# Altium PCB main.PcbDoc (part 2 of 3)
Units mm, origin at the board's own origin, x right, y up, seen from the top; angles counter-clockwise.
Board outline 126 x 86 mm, 2 copper layers (Top Layer, Bottom Layer); 214 components, 256 nets, 850 pads, 614 vias.
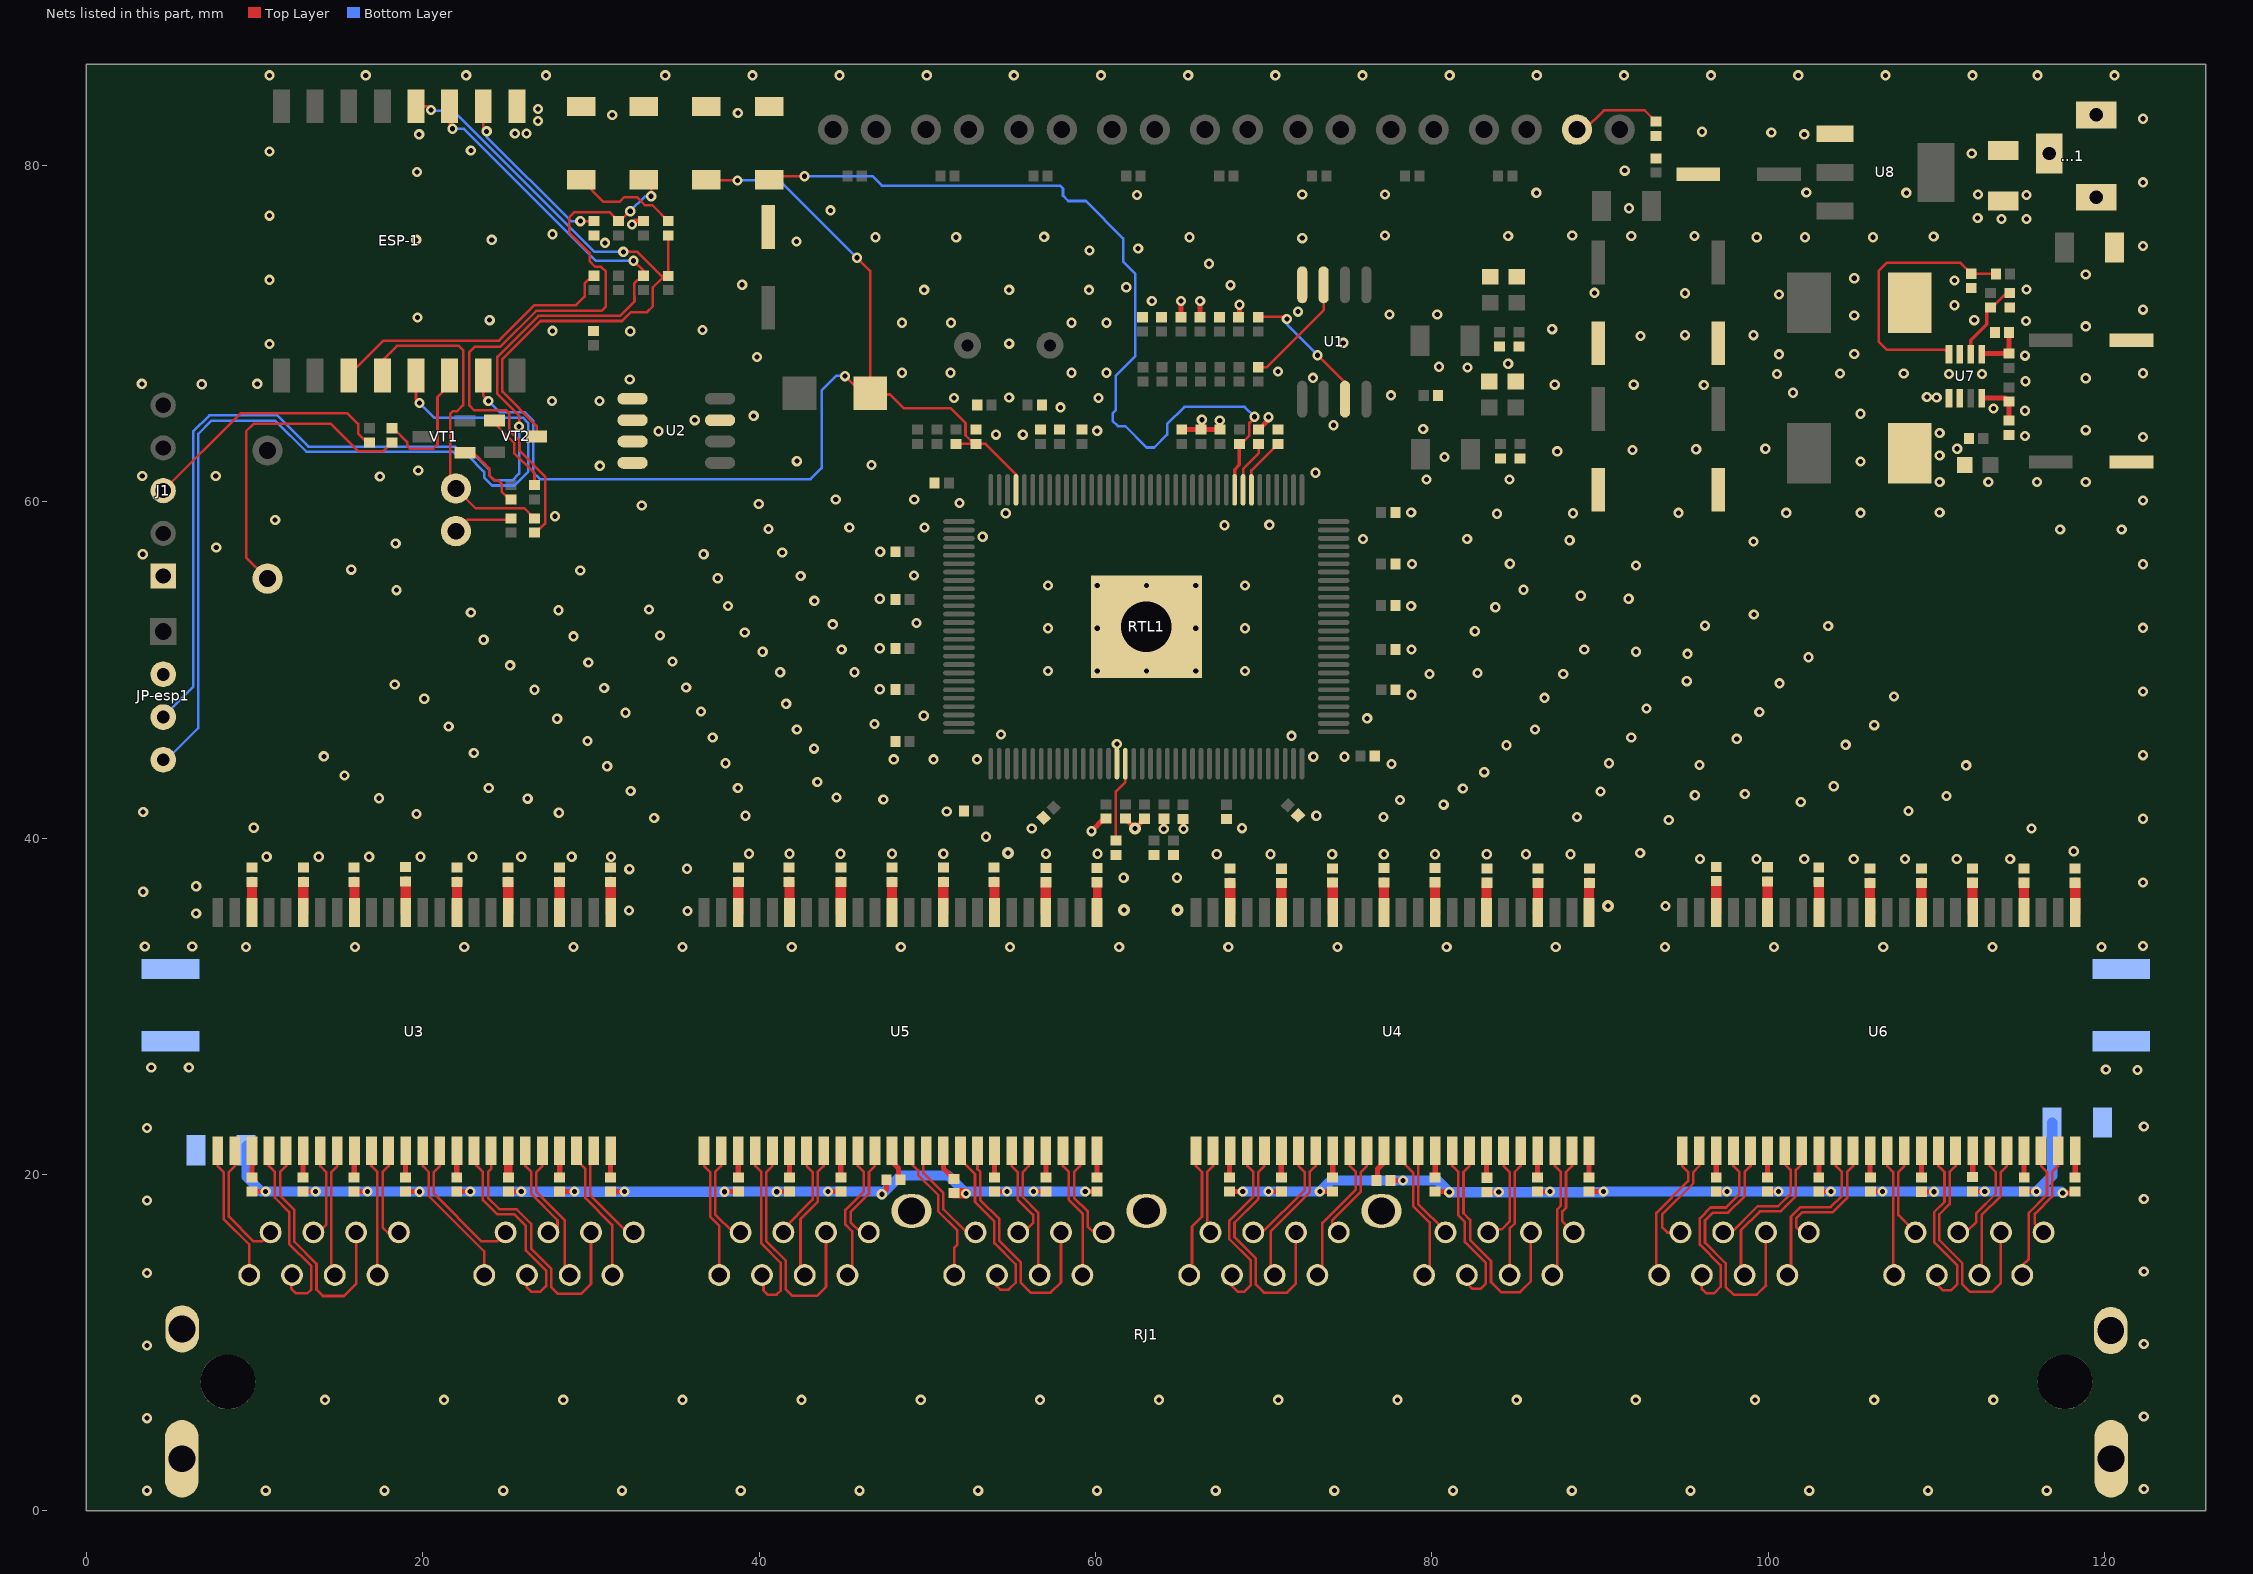
[diagram p2: the nets of this part, all layers, seen from the top]

## Via types
v1: diameter 0.61, hole 0.305, Top Layer to Bottom Layer, 609 vias
v2: diameter 0.711, hole 0.305, Top Layer to Bottom Layer, 5 vias

## Nets (pads, with @x,y where several pads share a name; then routed paths per layer and width w, separated by ;. In a path a pad name is that pad's centre, name@x,y a point inside that pad or via, vN(x,y) a via of type N, cw(c..) or ccw(c..) an arc to the next point about the centre after c; other vN are vias at no path point) (continued)
GND: C1.2 C2.2 C3.2 C4.1 C5.2 C6.2 C7.1 C8.1 C9.1 C10.1 C11.1 C12.1 C13.1 C14.1 C15.1 C16.1 C17.1 C18.1 C19.1 C20.1 C21.1 C22.1 C25.1 C26.1 C27.1 C28.1 C29.1 C30.1 C31.1 C32.1 C33.1 C34.1 C35.1 C36.1 C37.1 C38.1 C39.1 C40.1 C43.2 C44.2 C45.1 C46.1 C47.1 C48.1 C49.1 C50.1 C51.2 C52.2 C53.1 C54.1 C55.1 C56.1 C57.1 C58.1 C59.1 C60.1 C61.1 C62.1 C63.1 C64.1 C65.1 C66.1 C67.1 C68.1 C69.1 C70.1 C71.1 C72.1 C73.1 C74.1 C75.1 C76.1 C77.1 C78.1 C79.1 C80.1 C81.1 C82.1 C83.1 C84.1 C85.1 C86.1 C87.1 C88.1 C89.1 C90.1 C91.1 C92.1 C93.1 C94.1 ESP-1.9 J1.1 JP-esp1.2 L4.1 R1.1@40.589,83.496 R2.1@36.855,83.49 R11.2 R12.2 R13.2 R20.2 R21.2 R22.2 R23.2 R24.2 R25.2 R26.2 R36.1 R81.1 R82.1 RTL1.16 RTL1.129 S1.2 S2.2 U1.4 U2.1 U2.2 U2.3 U2.4 U2.7 U7.5 U8.1 | length 11.4
  Top Layer w0.305: v1(32.436,76.479) 32.632,76.676 C6.2@33.122,76.676 ; v1(59.766,40.411) 60.51,41.155 C80.1@60.63,41.155 ; C89.1@61.773,41.155 61.773,41.148 v2(62.357,40.564) 62.357,40.589 C82.1@62.916,41.148 ; v1(64.059,40.538) C93.1@64.059,41.148 ; R11.2@65.075,70.961 v1(65.075,71.933) ; C87.1@65.126,64.281 C45.1@66.269,64.281 C45.1@66.319,64.331 ; C83.1@65.202,41.129 65.202,40.564 v1(65.227,40.538) ; R25.2@66.218,70.961 v1(66.218,71.933) ; v1(66.319,64.872) C45.1@66.319,64.331 ; C90.1@67.412,64.281 66.319,64.281 C45.1@66.319,64.331 ; R12.2@68.504,70.961 68.555,71.012 v1(68.555,71.704) ; R20.2@69.698,64.281 70.282,64.865 v1(70.282,65.024)
  other v1: 9.487,33.528 15.977,33.528 22.466,33.528 28.956,33.528 35.446,33.528 41.935,33.528 48.425,33.528 54.915,33.528 61.404,33.528 67.894,33.528 74.384,33.528 80.874,33.528 87.363,33.528 93.853,33.528 100.343,33.528 106.832,33.528 113.322,33.528 119.812,33.528 3.48,33.553 6.299,33.553 122.276,33.579 6.528,35.509 35.738,35.662 32.258,35.687 93.878,35.966 3.378,36.805 6.528,37.135 122.276,37.362 61.671,37.643 64.846,37.643 32.283,38.151 35.712,38.176 95.936,38.76 99.289,38.76 102.133,38.76 105.08,38.76 108.128,38.76 111.201,38.76 114.376,38.76 10.719,38.887 13.818,38.887 16.815,38.887 19.863,38.887 22.962,38.887 25.857,38.887 28.854,38.887 31.191,38.887 67.208,39.04 70.409,39.04 74.066,39.04 77.14,39.04 80.188,39.04 83.261,39.04 85.598,39.04 88.24,39.04 39.395,39.065 41.808,39.065 44.831,39.065 47.904,39.065 50.952,39.065 57.048,39.065 60.122,39.065 92.38,39.116 118.161,39.218 53.492,40.081 56.21,40.564 115.646,40.564 68.707,40.589 9.957,40.615 94.082,41.072 122.276,41.146 33.757,41.199 77.114,41.25 88.621,41.25 39.192,41.326 73.127,41.326 19.634,41.427 28.092,41.504 3.378,41.554 51.156,41.58 108.331,41.605 80.696,41.986 101.93,42.139 78.105,42.266 47.385,42.29 26.238,42.342 17.399,42.367 44.602,42.418 110.592,42.494 95.631,42.545 98.603,42.621 90.018,42.774 32.36,42.799 81.839,42.951 23.927,42.977 38.735,42.977 103.886,43.078 43.459,43.332 15.342,43.713 83.109,43.917 30.963,44.272 111.76,44.323 95.91,44.348 77.597,44.399 37.998,44.45 90.526,44.45 48.006,44.679 50.368,44.679 52.959,44.679 72.949,44.831 74.803,44.831 14.122,44.856 122.276,44.93 23.038,45.06 43.256,45.314 84.43,45.517 104.597,45.542 61.265,45.593 29.794,45.771 98.12,45.898 37.236,45.974 91.846,45.974 71.653,46.076 54.381,46.152 42.24,46.457 86.131,46.457 21.539,46.634 106.299,46.711 46.863,46.787 27.991,47.092 76.149,47.117 49.784,47.269 32.055,47.447 99.466,47.498 36.551,47.523 92.761,47.701 41.605,47.981 20.091,48.285 86.69,48.336 107.467,48.412 78.791,48.514 122.276,48.713 26.645,48.819 47.168,48.844 30.785,48.92 35.662,48.946 18.339,49.124 100.66,49.2 95.148,49.327 79.858,49.759 87.808,49.759 82.702,49.809 41.25,49.86 45.669,49.86 57.175,49.936 60.103,49.936 63.03,49.936 65.957,49.936 68.885,49.936 25.197,50.267 29.845,50.444 34.849,50.495 102.387,50.749 95.199,50.952 40.208,51.079 92.126,51.079 44.907,51.206 78.791,51.206 89.052,51.206 47.168,51.283 23.622,51.791 28.956,51.994 34.112,52.045 39.141,52.222 82.55,52.299 57.175,52.476 60.103,52.476 65.957,52.476 68.885,52.476 122.276,52.497 103.556,52.603 96.241,52.629 44.374,52.705 49.352,52.781 99.136,53.289 22.86,53.416 28.067,53.543 33.452,53.594 83.769,53.721 38.151,53.797 78.765,53.797 43.282,54.102 47.168,54.229 91.694,54.229 88.849,54.407 18.44,54.737 85.446,54.762 57.175,55.016 60.103,55.016 63.03,55.016 65.957,55.016 68.885,55.016 37.541,55.448 42.469,55.575 49.21,55.615 29.362,55.905 15.748,55.956 92.126,56.21 78.816,56.286 122.276,56.281 84.633,56.312 3.353,56.871 36.703,56.871 41.377,56.972 47.193,57.023 7.722,57.277 18.39,57.506 99.111,57.633 88.189,57.709 75.895,57.785 82.093,57.785 53.289,57.912 117.348,58.344 121.006,58.344 40.564,58.369 45.364,58.471 49.835,58.471 67.666,58.598 70.333,58.623 11.227,58.903 27.864,59.131 83.871,59.284 54.661,59.309 88.392,59.309 94.666,59.334 101.067,59.334 105.486,59.334 78.765,59.36 110.185,59.36 33.02,59.766 39.98,59.868 51.918,59.919 122.276,60.064 44.554,60.122 49.225,60.122 110.185,61.163 113.081,61.163 115.976,61.163 118.872,61.163 79.68,61.316 84.607,61.316 17.45,61.493 3.327,61.519 7.696,61.519 73.076,61.722 19.736,61.849 30.531,62.128 46.685,62.179 105.486,62.382 42.24,62.408 80.747,62.662 110.185,62.738 87.452,62.992 91.923,63.068 95.707,63.119 99.822,63.144 111.227,63.144 122.276,63.848 115.265,63.906 54.077,63.983 55.677,63.983 110.185,64.084 34.011,64.186 60.096,64.211 118.872,64.249 79.477,64.313 74.143,64.541 67.386,64.821 36.17,64.846 39.675,65.1 105.486,65.227 115.265,65.405 113.386,65.532 57.912,65.608 27.686,65.989 30.505,65.989 51.587,66.167 60.173,66.167 54.864,66.192 110.007,66.192 109.423,66.218 77.572,66.319 101.473,66.472 96.164,66.929 87.3,66.954 91.999,66.954 6.858,66.98 3.302,67.005 10.16,67.005 115.291,67.158 32.309,67.259 118.872,67.335 72.923,67.361 100.508,67.589 110.744,67.589 112.7,67.589 104.267,67.615 108.052,67.615 122.276,67.631 48.489,67.666 51.384,67.666 58.572,67.666 60.655,67.666 70.841,67.742 82.118,67.97 80.416,68.021 84.531,68.199 39.878,68.605 115.265,68.682 100.635,68.758 105.105,68.783 10.897,69.367 54.864,69.393 74.727,69.444 92.405,69.85 95.047,69.901 99.111,69.901 32.334,70.129 27.711,70.155 36.627,70.206 87.147,70.256 118.872,70.421 48.489,70.637 51.41,70.637 58.572,70.637 60.655,70.637 115.316,70.739 23.978,70.79 112.243,70.79 19.685,70.942 105.105,71.069 77.47,71.12 80.315,71.12 72.034,71.298 122.276,71.415 111.074,71.679 63.348,71.933 100.635,72.314 95.047,72.39 89.662,72.415 49.809,72.593 54.864,72.593 59.614,72.593 115.341,72.619 61.824,72.746 68.021,72.873 38.989,72.898 111.074,73.152 10.897,73.186 105.105,73.279 118.872,73.508 66.751,74.143 59.639,74.93 62.535,75.057 122.276,75.199 30.836,75.387 42.215,75.463 19.609,75.565 24.105,75.565 72.288,75.667 46.914,75.717 51.714,75.717 65.583,75.717 99.314,75.717 102.184,75.717 106.223,75.717 56.947,75.743 109.83,75.768 84.531,75.794 91.846,75.794 95.606,75.794 77.216,75.819 88.341,75.819 27.711,75.895 113.868,76.81 115.341,76.81 112.446,76.86 10.897,77.004 44.247,77.318 91.719,77.445 62.459,78.232 115.341,78.232 72.288,78.257 77.216,78.257 112.471,78.257 86.208,78.359 108.204,78.359 102.26,78.384 122.276,78.982 19.66,79.604 91.465,79.68 112.09,80.696 10.897,80.823 22.86,80.874 19.787,81.839 102.133,81.839 25.476,81.89 26.162,81.89 100.178,81.94 96.063,81.991 26.848,82.626 122.276,82.766 31.267,82.982 38.735,83.109 26.848,83.337 10.897,85.344 16.612,85.344 22.581,85.344 27.33,85.344 34.417,85.344 39.599,85.344 44.78,85.344 49.962,85.344 55.143,85.344 60.325,85.344 65.507,85.344 70.688,85.344 75.87,85.344 81.051,85.344 86.233,85.344 91.415,85.344 96.596,85.344 101.778,85.344 106.959,85.344 112.141,85.344 116.002,85.344 120.574,85.344
  other v2: 61.697,35.712 64.872,35.712 90.475,35.966 54.788,39.116
GND_M: C23.1 C41.2 C43.1 C44.1 RJ1.0
  other v1: 3.61,1.2 10.669,1.2 17.728,1.2 24.787,1.2 31.845,1.2 38.904,1.2 45.963,1.2 53.022,1.2 60.081,1.2 67.14,1.2 74.198,1.2 81.257,1.2 88.316,1.2 95.375,1.2 102.434,1.2 109.493,1.2 116.551,1.2 122.326,1.295 3.61,5.512 122.326,5.608 14.185,6.6 21.27,6.6 28.355,6.6 35.44,6.6 42.525,6.6 49.61,6.6 56.695,6.6 63.78,6.6 70.865,6.6 77.95,6.6 85.035,6.6 92.12,6.6 99.205,6.6 106.29,6.6 113.375,6.6 3.61,9.825 122.326,9.92 3.61,14.137 122.326,14.233 3.61,18.45 122.326,18.545 3.61,22.762 122.326,22.858 121.945,26.213 120.066,26.238 3.861,26.365 6.096,26.365
GPIO0: ESP-1.12 R32.2 R34.1 VT2.3 | length 39.3
  Top Layer w0.152: ESP-1.12@19.6,83.5 20.284,83.5 v1(20.498,83.287) ; VT2.3@26.777,63.881 26.777,64.5 24.74,66.537 24.74,68.478 27,70.739 31.851,70.739 32.384,71.272 33.343,71.272 33.675,71.605 33.675,72.737 R34.1@34.363,73.425 ; v1(31.928,74.854) 32.766,74.854 34.195,73.425 R34.1@34.363,73.425 ; R32.2@34.595,75.826 R34.1@34.595,73.425 R34.1@34.363,73.425
  Bottom Layer w0.152: v1(20.498,83.287) 20.549,83.236 21.826,83.236 30.208,74.854 v1(31.928,74.854)
GPIO0_RTL: R1.2@40.589,79.146 R14.1 RTL1.73 | length 50.2
  Top Layer w0.152: R1.2@40.589,79.146 40.792,79.35 v1(42.697,79.35) ; R14.1@68.555,63.431 68.653,63.431 69.144,63.922 69.144,64.675 69.444,64.975 v1(69.444,65.049)
  Top Layer w0.203: RTL1.73@68.27,60.705 68.27,61.905 68.555,62.189 R14.1@68.555,63.431
  Bottom Layer w0.152: v1(42.697,79.35) 46.737,79.35 47.296,78.791 57.887,78.791 58.064,78.613 58.064,78.189 58.377,77.876 59.426,77.876 61.646,75.657 61.646,74.27 62.357,73.558 62.357,68.638 61.214,67.495 61.214,65.448 61.011,65.245 61.011,64.803 61.323,64.491 61.765,64.491 63.035,63.221 63.491,63.221 64.262,63.991 64.262,64.618 65.278,65.634 68.859,65.634 v1(69.444,65.049)
GPIO2: ESP-1.11 JP-esp1.3 R35.1 | length 74.8
  Top Layer w0.152: ESP-1.11@21.6,83.5 21.6,82.337 v1(21.768,82.169) ; v1(25.73,64.465) 25.73,65.115 24.435,66.411 24.435,68.605 26.874,71.044 31.725,71.044 32.588,71.907 32.588,72.167 32.568,72.187 32.568,72.976 33.023,73.431 R35.1@33.122,73.431 33.122,73.736 v1(32.537,74.32)
  Bottom Layer w0.152: JP-esp1.3@4.563,47.203 6.35,48.99 6.35,64.16 7.315,65.126 11.355,65.126 13.209,63.271 21.934,63.271 22.163,63.043 22.81,63.043 23.952,61.901 23.952,61.57 24.257,61.265 25.324,61.265 25.73,61.671 v1(25.73,64.465) ; v1(21.768,82.169) 22.462,82.169 30.311,74.32 v1(32.537,74.32)
GPIO12: ESP-1.6 R38.2 | length 7.9
  Top Layer w0.152: R38.2@18.161,64.364 18.259,64.364 19.075,63.547 19.075,63.297 19.228,63.144 20.625,63.144 20.879,63.398 20.879,66.218 21.6,66.939 ESP-1.6@21.6,67.5
GPIO14: ESP-1.5 JP-esp1.4 | length 55.2
  Top Layer w0.152: ESP-1.5@19.6,67.5 19.6,66.074 v1(19.812,65.862)
  Bottom Layer w0.152: JP-esp1.4@4.572,44.653 4.242,44.323 4.242,44.12 6.655,46.533 6.655,64.034 7.441,64.821 11.229,64.821 13.083,62.967 21.808,62.967 22.036,62.738 22.684,62.738 23.647,61.774 23.647,61.443 24.131,60.96 25.45,60.96 26.264,61.774 26.264,64.686 25.951,64.999 20.676,64.999 v1(19.812,65.862)
GPIO16: ESP-1.4 LED1.K R39.2 | length 20.4
  Top Layer w0.152: ESP-1.4@17.6,67.5 17.6,68.4 18.466,69.266 22.149,69.266 22.403,69.012 22.403,65.735 22.052,65.384 21.79,65.384 21.641,65.235 21.641,61.112 LED1.K@21.971,60.782 23.146,59.607 26.042,59.607 R39.2@26.645,59.004
MP2122_FB1: R80.1 R82.2 U7.8 | length 2.8
  Top Layer w0.305: U7.8@112.684,66.162 114.083,66.162 R80.1@114.3,65.945 R82.2@114.3,64.814
MP2122_FB2: R79.1 R81.2 U7.1 | length 2.9
  Top Layer w0.152: U7.1@112.684,68.762 U7.1@112.724,68.802 ; R81.2@114.3,70.035 R81.2@114.319,70.053
  Top Layer w0.305: U7.1@112.724,68.802 R79.1@114.3,68.802 R81.2@114.3,70.035
MP2122_SW1: L6.1 U7.6
MP2122_SW2: L5.1 U7.3
N0A_N: RJ1.1 U3.25 | length 8.2
  Top Layer w0.152: U3.25@7.81,21.421 7.81,20.495 8.166,20.139 8.166,17.363 9.685,15.844 RJ1.1@9.685,14
N0A_P: RJ1.2 U3.26 | length 7.4
  Top Layer w0.152: U3.26@8.826,21.421 8.826,20.495 8.471,20.139 8.471,17.49 9.935,16.025 10.44,16.025 RJ1.2@10.955,16.54
N0B_N: RJ1.3 U3.28 | length 11.5
  Top Layer w0.152: U3.28@10.858,21.421 10.858,20.495 11.214,20.139 11.214,18.615 12.06,17.768 12.06,15.874 13.38,14.554 13.38,13.17 13.135,12.925 12.46,12.925 12.185,13.2 12.185,13.96 RJ1.3@12.225,14
N0B_P: RJ1.6 U3.29 | length 15.2
  Top Layer w0.152: U3.29@11.874,21.421 11.874,20.495 11.519,20.139 11.519,18.741 12.365,17.894 12.365,16 13.685,14.68 13.685,13.15 14.06,12.775 15.31,12.775 16.035,13.5 RJ1.6@16.035,16.54
N0C_N: RJ1.4 U3.31 | length 5.5
  Top Layer w0.152: RJ1.4@13.495,16.54 13.8,16.54 14.262,17.002 14.262,20.139 13.906,20.495 U3.31@13.906,21.421
N0C_P: RJ1.5 U3.32 | length 7.9
  Top Layer w0.152: RJ1.5@14.567,14.199 RJ1.5@14.765,14 ; RJ1.5@14.769,14.019 14.562,14.225 14.562,16.871 14.567,16.875 14.567,20.139 14.922,20.495 U3.32@14.922,21.421
N0D_N: RJ1.7 U3.34 | length 7.6
  Top Layer w0.152: U3.34@16.954,21.421 16.954,20.495 17.309,20.141 RJ1.7@17.309,14.019 ; RJ1.7@17.305,14 RJ1.7@17.31,14.005
N0D_P: RJ1.8 U3.35 | length 5.8
  Top Layer w0.152: U3.35@17.97,21.421 17.97,20.495 17.615,20.139 17.615,16.846 17.92,16.54 RJ1.8@18.575,16.54
N1A_N: RJ1.9 U3.37 | length 8.9
  Top Layer w0.152: U3.37@20.002,21.421 20.002,20.495 20.358,20.139 20.358,18.733 23.655,15.435 RJ1.9@23.655,14
N1A_P: RJ1.10 U3.38 | length 8.4
  Top Layer w0.152: U3.38@21.018,21.421 21.018,20.495 20.663,20.139 20.663,18.859 23.497,16.025 24.41,16.025 RJ1.10@24.925,16.54
N1B_N: RJ1.11 U3.40 | length 12.5
  Top Layer w0.152: U3.40@23.05,21.421 23.05,20.671 23.579,20.142 23.579,18.483 24.435,17.628 25.452,17.628 26.135,16.944 26.135,15.474 27.33,14.279 27.33,13.37 26.985,13.025 26.46,13.025 26.195,13.29 RJ1.11@26.195,14
N1B_P: RJ1.14 U3.41 | length 16.2
  Top Layer w0.152: U3.41@24.066,21.421 24.066,20.332 23.884,20.15 23.884,18.609 24.561,17.932 25.578,17.932 26.44,17.07 26.44,15.6 27.635,14.405 27.635,13.3 28.035,12.9 29.41,12.9 30.005,13.495 RJ1.14@30.005,16.54
N1C_N: RJ1.12 U3.43 | length 6.2
  Top Layer w0.152: U3.43@26.098,21.421 26.098,20.495 26.454,20.139 26.454,18.834 28.01,17.278 28.01,16.54 RJ1.12@27.465,16.54
N1C_P: RJ1.13 U3.44 | length 8.4
  Top Layer w0.152: U3.44@27.114,21.421 27.114,20.495 26.759,20.139 26.759,18.961 28.435,17.285 28.435,14.3 RJ1.13@28.735,14
N1D_N: RJ1.15 U3.46 | length 8.3
  Top Layer w0.152: U3.46@29.146,21.421 29.146,20.849 29.667,20.328 29.667,18.593 31.26,17 31.26,14.015 RJ1.15@31.275,14
N1D_P: RJ1.16 U3.47 | length 6.2
  Top Layer w0.152: U3.47@30.162,21.421 29.972,21.231 29.972,18.743 32.175,16.54 RJ1.16@32.545,16.54
N2A_N: RJ1.17 U5.25 | length 7.8
  Top Layer w0.152: U5.25@36.726,21.421 36.726,20.495 37.082,20.139 37.082,17.497 37.625,16.954 RJ1.17@37.625,14
N2A_P: RJ1.18 U5.26 | length 5.9
  Top Layer w0.152: U5.26@37.742,21.421 37.742,20.495 37.387,20.139 37.387,17.624 38.47,16.54 RJ1.18@38.895,16.54
N2B_N: RJ1.19 U5.28 | length 11.1
  Top Layer w0.152: U5.28@39.774,21.421 39.774,20.495 40.13,20.139 40.13,15.899 41.285,14.744 41.285,13.1 41.035,12.85 40.51,12.85 40.26,13.1 40.26,13.905 RJ1.19@40.165,14
N2B_P: RJ1.22 U5.29 | length 14.9
  Top Layer w0.152: U5.29@40.79,21.421 40.79,20.495 40.435,20.139 40.435,16.026 41.59,14.87 41.59,13.17 41.96,12.8 43.46,12.8 43.975,13.315 RJ1.22@43.975,16.54
N2C_N: RJ1.20 U5.31 | length 5.8
  Top Layer w0.152: RJ1.20@41.435,16.54 41.435,16.757 43.178,18.5 43.178,20.139 42.822,20.495 U5.31@42.822,21.421
N2C_P: RJ1.21 U5.32 | length 8.1
  Top Layer w0.152: RJ1.21@42.705,14 42.46,14.245 42.46,17.351 43.483,18.374 43.483,20.139 43.838,20.495 U5.32@43.838,21.421
N2D_N: RJ1.23 U5.34 | length 8.3
  Top Layer w0.152: RJ1.23@45.245,14 45.535,14.29 45.535,16.619 45.13,17.024 45.13,17.895 46.226,18.991 46.226,20.139 45.87,20.495 U5.34@45.87,21.421
N2D_P: RJ1.24 U5.35 | length 6.2
  Top Layer w0.152: RJ1.24@46.515,16.54 46.045,16.54 45.435,17.15 45.435,17.769 46.531,18.864 46.531,20.139 46.886,20.495 U5.35@46.886,21.421
N3A_N: RJ1.25 U5.37 | length 8.7
  Top Layer w0.152: U5.37@48.918,21.421 48.918,20.779 49.454,20.244 49.454,19.96 50.648,18.766 50.648,17.807 51.791,16.664 51.791,15.825 51.595,15.629 RJ1.25@51.595,14
N3A_P: RJ1.26 U5.38 | length 6.5
  Top Layer w0.152: U5.38@49.934,21.421 49.759,21.246 49.759,20.086 50.952,18.892 50.952,17.933 52.345,16.54 RJ1.26@52.865,16.54
N3B_N: RJ1.27 U5.40 | length 11.3
  Top Layer w0.152: U5.40@51.966,21.421 51.966,20.881 52.832,20.015 52.832,18.364 53.98,17.216 53.98,15.924 55.255,14.649 55.255,13.57 54.835,13.15 54.335,13.15 54.085,13.4 54.085,13.95 RJ1.27@54.135,14
N3B_P: RJ1.30 U5.41 | length 14.8
  Top Layer w0.152: U5.41@52.982,21.421 52.982,20.322 53.137,20.168 53.137,18.49 54.285,17.342 54.285,16.05 55.56,14.775 55.56,13.55 56.135,12.975 57.335,12.975 57.945,13.585 RJ1.30@57.945,16.54
N3C_N: RJ1.28 U5.43 | length 5.9
  Top Layer w0.152: U5.43@55.014,21.421 55.014,20.495 55.37,20.139 55.37,18.519 56.285,17.603 56.285,17.125 55.7,16.54 RJ1.28@55.405,16.54
N3C_P: RJ1.29 U5.44 | length 8
  Top Layer w0.152: U5.44@56.03,21.421 56.03,20.495 55.675,20.139 55.675,18.645 56.59,17.73 56.59,14.085 RJ1.29@56.675,14
N3D_N: RJ1.31 U5.46 | length 7.9
  Top Layer w0.152: U5.46@58.062,21.421 58.062,20.495 58.418,20.139 58.418,18.486 59.245,17.659 59.245,14.029 RJ1.31@59.215,14
N3D_P: RJ1.32 U5.47 | length 6.1
  Top Layer w0.152: U5.47@59.078,21.421 59.078,20.495 58.723,20.139 58.723,18.613 59.549,17.786 59.549,16.886 59.895,16.54 RJ1.32@60.485,16.54
N4A_N: RJ1.33 U4.25 | length 7.9
  Top Layer w0.152: RJ1.33@65.565,14 65.735,14.17 65.735,16.9 66.33,17.495 66.33,20.139 65.974,20.495 U4.25@65.974,21.421
N4A_P: RJ1.34 U4.26 | length 5.1
  Top Layer w0.152: RJ1.34@66.827,16.548 RJ1.34@66.835,16.54 ; RJ1.34@66.839,16.559 66.635,16.763 66.635,20.139 66.99,20.495 U4.26@66.99,21.421
N4B_N: RJ1.35 U4.28 | length 11.3
  Top Layer w0.152: RJ1.35@68.105,14 68.105,13.38 68.46,13.025 68.835,13.025 69.23,13.42 69.23,14.874 67.955,16.149 67.955,17.256 69.378,18.679 69.378,20.139 69.022,20.495 U4.28@69.022,21.421
N4B_P: RJ1.38 U4.29 | length 15.1
  Top Layer w0.152: U4.29@70.038,21.421 70.038,20.495 69.683,20.139 69.683,18.552 68.26,17.13 68.26,16.275 69.535,15 69.535,13.45 70.01,12.975 71.385,12.975 71.915,13.505 RJ1.38@71.915,16.54
N4C_N: RJ1.36 U4.31 | length 6.6
  Top Layer w0.152: RJ1.36@69.375,16.54 69.906,16.54 72.426,19.06 72.426,20.139 72.07,20.495 U4.31@72.07,21.421
N4C_P: RJ1.37 U4.32 | length 8.6
  Top Layer w0.152: RJ1.37@70.645,14 70.41,14.235 70.41,16.613 72.731,18.933 72.731,20.139 73.086,20.495 U4.32@73.086,21.421
N4D_N: RJ1.39 U4.34 | length 8.5
  Top Layer w0.152: RJ1.39@73.185,14 73.485,14.3 73.485,17.123 75.474,19.111 75.474,20.139 75.118,20.495 U4.34@75.118,21.421
N4D_P: RJ1.40 U4.35 | length 6.3
  Top Layer w0.152: RJ1.40@74.455,16.54 74.17,16.54 74.066,16.436 74.066,17.272 75.779,18.985 75.779,20.139 76.134,20.495 U4.35@76.134,21.421
N5A_N: RJ1.41 U4.37 | length 8.3
  Top Layer w0.152: U4.37@78.166,21.421 78.166,20.818 78.877,20.106 78.877,18.125 79.858,17.145 79.858,14.322 RJ1.41@79.535,14
N5A_P: RJ1.42 U4.38 | length 5.6
  Top Layer w0.152: U4.38@79.182,21.421 79.182,18.251 80.805,16.628 RJ1.42@80.805,16.54
N5B_N: RJ1.43 U4.40 | length 10.6
  Top Layer w0.152: U4.40@81.214,21.421 81.214,20.495 81.57,20.139 81.57,17.566 81.96,17.176 81.96,15.974 83.205,14.729 83.205,13.52 82.885,13.2 82.41,13.2 82.075,13.535 RJ1.43@82.075,14
N5B_P: RJ1.46 U4.41 | length 14.4
  Top Layer w0.152: U4.41@82.23,21.421 82.23,20.495 81.875,20.139 81.875,17.693 82.265,17.302 82.265,16.1 83.51,14.855 83.51,13.6 84.11,13 85.235,13 85.885,13.65 RJ1.46@85.885,16.54
N5C_N: RJ1.44 U4.43 | length 5.9
  Top Layer w0.152: RJ1.44@83.345,16.54 83.545,16.74 84.15,16.74 84.618,17.208 84.618,20.139 84.262,20.495 U4.43@84.262,21.421
N5C_P: RJ1.45 U4.44 | length 7.7
  Top Layer w0.152: RJ1.45@84.615,14 84.615,16.774 84.923,17.081 84.923,20.139 85.278,20.495 U4.44@85.278,21.421
N5D_N: RJ1.47 U4.46 | length 7.8
  Top Layer w0.152: RJ1.47@87.155,14 87.452,14.297 87.452,17.932 87.666,18.145 87.666,20.139 87.31,20.495 U4.46@87.31,21.421
N5D_P: RJ1.48 U4.47 | length 5.4
  Top Layer w0.152: U4.47@88.326,21.421 88.326,20.495 87.971,20.139 87.971,18.019 87.757,17.805 87.757,17.208 RJ1.48@88.425,16.54
N6A_N: RJ1.49 U6.25 | length 8.4
  Top Layer w0.152: RJ1.49@93.505,14 93.345,14.16 93.345,17.716 95.233,19.603 95.233,20.139 94.877,20.495 U6.25@94.877,21.421
N6A_P: RJ1.50 U6.26 | length 6.7
  Top Layer w0.152: RJ1.50@94.775,16.54 93.995,16.54 93.701,16.835 93.701,17.64 95.537,19.477 95.537,20.139 95.893,20.495 U6.26@95.893,21.421
N6B_N: RJ1.51 U6.28 | length 12.5
  Top Layer w0.152: RJ1.51@96.045,14 96.045,13.19 96.31,12.925 96.76,12.925 97.16,13.325 97.16,14.594 95.93,15.824 95.93,17.394 96.571,18.034 97.486,18.034 98.281,18.829 98.281,20.139 97.925,20.495 U6.28@97.925,21.421
N6B_P: RJ1.54 U6.29 | length 16.2
  Top Layer w0.152: U6.29@98.941,21.421 98.941,20.495 98.585,20.139 98.585,18.702 97.612,17.729 96.697,17.729 96.235,17.267 96.235,15.95 97.465,14.72 97.465,13.32 97.935,12.85 99.31,12.85 99.86,13.4 99.855,13.405 RJ1.54@99.855,16.54
N6C_N: RJ1.52 U6.31 | length 7.7
  Top Layer w0.152: RJ1.52@97.315,16.54 97.365,16.491 97.745,16.491 99.365,18.11 100.585,18.11 101.321,18.846 101.321,20.269 100.973,20.617 U6.31@100.973,21.421
N6C_P: RJ1.53 U6.32 | length 9.7
  Top Layer w0.152: RJ1.53@98.585,14 98.374,14.211 98.374,16.689 99.491,17.805 100.711,17.805 101.635,18.729 101.635,20.278 101.989,20.633 U6.32@101.989,21.421
N6D_N: RJ1.55 U6.34 | length 10
  Top Layer w0.152: RJ1.55@101.125,14 101.09,14.035 101.09,14.298 101.346,14.554 101.346,17.5 101.906,18.059 103.709,18.059 104.377,18.727 104.377,20.139 104.021,20.495 U6.34@104.021,21.421
N6D_P: RJ1.56 U6.35 | length 7.9
  Top Layer w0.152: RJ1.56@102.395,16.54 101.976,16.54 101.651,16.866 101.651,17.374 102.032,17.755 103.835,17.755 104.681,18.601 104.681,20.139 105.037,20.495 U6.35@105.037,21.421
N7A_N: RJ1.57 U6.37 | length 7.6
  Top Layer w0.152: U6.37@107.069,21.421 107.069,20.495 107.425,20.139 107.425,14.073 RJ1.57@107.479,14.019 ; RJ1.57@107.475,14 RJ1.57@107.486,14.011
N7A_P: RJ1.58 U6.38 | length 5.4
  Top Layer w0.152: U6.38@108.085,21.421 108.085,20.495 107.729,20.139 107.729,17.578 RJ1.58@108.749,16.559
N7B_N: RJ1.59 U6.40 | length 11
  Top Layer w0.152: RJ1.59@110.015,14 110.015,13.47 110.36,13.125 110.885,13.125 111.235,13.475 111.235,14.594 109.855,15.974 109.855,17.754 110.473,18.371 110.473,20.139 110.117,20.495 U6.40@110.117,21.421
N7B_P: RJ1.62 U6.41 | length 14.6
  Top Layer w0.152: U6.41@111.133,21.421 111.133,20.495 110.777,20.139 110.777,18.245 110.16,17.628 110.16,16.1 111.54,14.72 111.54,13.47 111.985,13.025 113.31,13.025 113.825,13.54 RJ1.62@113.825,16.54
N7C_N: RJ1.60 U6.43 | length 6.2
  Top Layer w0.152: RJ1.60@111.285,16.54 111.725,16.54 112.371,17.186 112.371,17.704 113.521,18.854 113.521,20.139 113.165,20.495 U6.43@113.165,21.421
N7C_P: RJ1.61 U6.44 | length 8
  Top Layer w0.152: RJ1.61@112.676,14 112.676,17.578 113.825,18.728 113.825,20.139 114.181,20.495 U6.44@114.181,21.421
N7D_N: RJ1.63 U6.46 | length 8.2
  Top Layer w0.152: RJ1.63@115.095,14 115.095,14.565 115.085,14.575 115.49,14.98 115.49,17.725 116.569,18.803 116.569,20.139 116.213,20.495 U6.46@116.213,21.421
N7D_P: RJ1.64 U6.47 | length 5.7
  Top Layer w0.152: RJ1.64@116.365,16.54 115.845,17.06 115.845,17.649 116.873,18.677 116.873,20.139 117.229,20.495 U6.47@117.229,21.421
Net...1_1: ...1.1 L1.2
Net...1_2: ...1.2 ...1.3 L4.2
NetC7_2: C7.2 U3.1 | length 1.8
  Top Layer w0.61: C7.2@31.166,37.396 31.178,37.383 U3.1@31.178,35.576
NetC8_2: C8.2 U4.1 | length 1.8
  Top Layer w0.61: U4.1@89.342,35.576 89.342,37.323 C8.2@89.357,37.338
NetC9_2: C9.2 U3.4 | length 1.8
  Top Layer w0.61: U3.4@28.13,35.576 28.13,37.383 C9.2@28.143,37.396
NetC10_2: C10.2 U4.4 | length 1.8
  Top Layer w0.61: U4.4@86.294,35.576 86.309,35.591 C10.2@86.309,37.338
NetC11_2: C11.2 U3.7 | length 1.8
  Top Layer w0.61: C11.2@25.07,37.396 25.082,37.383 U3.7@25.082,35.576
NetC12_2: C12.2 U4.7 | length 1.8
  Top Layer w0.61: U4.7@83.246,35.576 83.246,37.33 C12.2@83.261,37.345
NetC13_2: C13.2 U3.10 | length 1.8
  Top Layer w0.61: U3.10@22.034,35.576 22.034,37.383 C13.2@22.047,37.396
NetC14_2: C14.2 U4.10 | length 1.8
  Top Layer w0.61: C14.2@80.188,37.37 80.188,35.587 U4.10@80.198,35.576
NetC15_2: C15.2 U3.13 | length 1.8
  Top Layer w0.61: C15.2@18.974,37.421 18.986,37.409 U3.13@18.986,35.576
NetC16_2: C16.2 U4.13 | length 1.8
  Top Layer w0.61: C16.2@77.14,37.363 77.15,37.353 U4.13@77.15,35.576
NetC17_2: C17.2 U3.16 | length 1.8
  Top Layer w0.61: C17.2@15.926,37.396 15.938,37.383 U3.16@15.938,35.576
NetC18_2: C18.2 U4.16 | length 1.8
  Top Layer w0.61: C18.2@74.092,37.352 74.102,37.341 U4.16@74.102,35.576
NetC19_2: C19.2 U3.19 | length 1.8
  Top Layer w0.61: U3.19@12.89,35.576 12.89,37.383 C19.2@12.903,37.396
NetC20_2: C20.2 U4.19 | length 1.8
  Top Layer w0.61: C20.2@71.044,37.326 71.054,37.316 U4.19@71.054,35.576
NetC21_2: C21.2 U3.22 | length 1.8
  Top Layer w0.61: U3.22@9.842,35.576 9.842,37.383 C21.2@9.855,37.396
NetC22_2: C22.2 U4.22 | length 1.8
  Top Layer w0.61: C22.2@67.996,37.338 68.006,37.328 U4.22@68.006,35.576
NetC23_2: C23.2 R44.2 R46.2 R48.2 R50.2 R52.2 R54.2 R56.2 R58.2 R60.2 R62.2 R64.2 R66.2 R68.2 R70.2 R72.2 R74.2 | length 65.8
  Top Layer w0.305: R58.2@9.855,18.981 v1(10.661,18.981) ; R56.2@12.878,18.981 v1(13.633,18.981) ; R54.2@15.926,18.981 v1(16.72,18.981) v1@16.739,18.999 ; R52.2@18.981,18.974 R52.2@18.974,18.981 19.805,18.981 v1(19.812,18.974) ; R50.2@22.022,18.981 v1(22.828,18.981) ; R48.2@25.095,18.981 v1(25.857,18.981) ; R46.2@28.143,18.981 v1(29.025,18.981) ; R44.2@31.166,18.981 v1(31.997,18.981) ; v1(37.948,18.974) 37.954,18.981 R74.2@38.76,18.981 ; v1(41.046,18.974) 41.053,18.981 R72.2@41.808,18.981 ; v1@44.094,18.974 v1(44.101,18.981) R70.2@44.856,18.981 ; v1(47.295,18.821) 47.562,19.089 R68.2@47.562,19.685 ; R64.2@54,18.981 v1(54.73,18.981) ; v1(56.305,18.981) R62.2@57.048,18.981 ; v1(59.392,18.981) R60.2@60.096,18.981
  Top Layer w0.61: R66.2@51.587,18.886 52.285,18.886 v1(52.299,18.872)
  Bottom Layer w0.61: C23.2@9.525,21.717 9.525,19.854 10.399,18.981 v1(10.661,18.981) v1(13.633,18.981) v1(16.72,18.981) v1(22.828,18.981) v1(25.857,18.981) 25.864,18.974 v1(37.948,18.974) 37.954,18.981 v1(44.101,18.981) 47.136,18.981 v1(47.295,18.821) 48.412,19.939 51.232,19.939 v1(52.299,18.872) 52.407,18.981 v1(54.73,18.981) v1(56.305,18.981) v1(59.392,18.981)
NetC25_2: C25.2 U5.1 | length 1.8
  Top Layer w0.508: U5.1@60.094,35.576 60.094,37.368 C25.2@60.096,37.37
NetC26_2: C26.2 U6.1 | length 1.8
  Top Layer w0.61: C26.2@118.237,37.345 118.245,37.337 U6.1@118.245,35.576
NetC27_2: C27.2 U5.4 | length 1.8
  Top Layer w0.61: U5.4@57.046,35.576 57.046,37.368 C27.2@57.048,37.37
NetC28_2: C28.2 U6.4 | length 1.8
  Top Layer w0.61: C28.2@115.189,37.345 115.197,37.337 U6.4@115.197,35.576
NetC29_2: C29.2 U5.7 | length 1.8
  Top Layer w0.61: C29.2@53.975,37.396 53.998,37.372 U5.7@53.998,35.576
NetC30_2: C30.2 U6.7 | length 1.8
  Top Layer w0.61: C30.2@112.141,37.345 112.141,35.584 U6.7@112.149,35.576
NetC31_2: C31.2 U5.10 | length 1.8
  Top Layer w0.61: U5.10@50.95,35.576 50.95,37.393 C31.2@50.952,37.396
NetC32_2: C32.2 U6.10 | length 1.8
  Top Layer w0.61: C32.2@109.093,37.338 109.101,37.33 U6.10@109.101,35.576
NetC33_2: C33.2 U5.13 | length 1.8
  Top Layer w0.61: U5.13@47.902,35.576 47.904,35.579 C33.2@47.904,37.396
NetC34_2: C34.2 U6.13 | length 1.8
  Top Layer w0.61: C34.2@106.045,37.338 106.045,35.584 U6.13@106.053,35.576
NetC35_2: C35.2 U5.16 | length 1.8
  Top Layer w0.61: U5.16@44.854,35.576 44.856,35.579 C35.2@44.856,37.396
NetC36_2: C36.2 U6.16 | length 1.8
  Top Layer w0.61: C36.2@102.997,37.389 103.005,37.381 U6.16@103.005,35.576
NetC37_2: C37.2 U5.19 | length 1.8
  Top Layer w0.61: C37.2@41.783,37.396 41.806,37.372 U5.19@41.806,35.576
NetC38_2: C38.2 U6.19 | length 1.8
  Top Layer w0.61: C38.2@99.949,37.414 99.957,37.406 U6.19@99.957,35.576
NetC39_2: C39.2 U5.22 | length 1.8
  Top Layer w0.61: U5.22@38.758,35.576 38.758,37.393 C39.2@38.76,37.396
NetC40_2: C40.2 U6.22 | length 1.9
  Top Layer w0.61: C40.2@96.901,37.44 96.909,37.432 U6.22@96.909,35.576
NetC41_1: C41.1 R45.2 R47.2 R49.2 R51.2 R53.2 R55.2 R57.2 R59.2 R61.2 R63.2 R65.2 R67.2 R69.2 R71.2 R73.2 R75.2 | length 65.8
  Top Layer w0.305: R59.2@67.97,18.981 v1(68.751,18.981) ; v1(70.282,18.981) R57.2@71.044,18.981 ; v1(73.337,18.981) R55.2@74.092,18.981 ; R53.2@77.546,19.634 v1(78.283,19.634) ; R51.2@80.188,18.981 v1@81.001,18.981 ; R49.2@83.261,18.955 v1(83.972,18.955) ; R47.2@86.284,18.981 v1(87.014,18.981) ; R45.2@89.332,18.981 v1(90.195,18.981) v1@90.253,18.981 ; R75.2@96.901,18.981 v1(97.543,18.981) ; R73.2@99.949,18.981 v1(100.603,18.981) ; R71.2@102.997,18.981 v1(103.715,18.981) ; R69.2@106.07,18.981 v1(106.788,18.981) ; R67.2@109.093,18.974 v1(109.855,18.974) ; R65.2@112.141,18.987 v1(112.866,18.987) ; R63.2@115.214,18.981 v1(115.932,18.981) ; v1(117.5,18.898) 118.154,18.898 R61.2@118.237,18.981
  Bottom Layer w0.61: v1(68.751,18.981) v1(70.282,18.981) v1(73.337,18.981) 73.99,19.634 v1(78.283,19.634) 80.34,19.634 v1(81.026,18.948) 90.163,18.948 v1(90.195,18.981) v1(97.543,18.981) v1(100.603,18.981) v1(103.715,18.981) v1(106.788,18.981) v1(115.932,18.981) ; C41.1@116.874,23.089 116.874,19.922 v1(115.932,18.981) ; v1(117.5,18.898) 117.417,18.981 v1(115.932,18.981)
NetC51_1: C51.1 R76.1 U7.4 | length 16.1
  Top Layer w0.152: U7.4@110.734,68.762 110.459,69.037 107.036,69.037 106.553,69.52 106.553,73.711 107.036,74.193 111.423,74.193 C51.1@112.065,73.552 113.508,73.552 R76.1@113.526,73.533
NetC52_1: C52.1 R77.1 U7.2 | length 4.8
  Top Layer w0.152: R77.1@113.208,71.552 113.306,71.552 114.156,72.402 C52.1@114.351,72.402
  Top Layer w0.203: U7.2@112.034,68.762 112.034,69.603 112.979,70.548 112.979,71.323 R77.1@113.208,71.552
NetD9_2: D9.K R13.1 | length 5.4
  Top Layer w0.152: D9.K@88.621,82.119 89.078,82.119 90.221,83.261 92.652,83.261 R13.1@93.32,82.594
NetESP-1_3: ESP-1.3 R33.2 | length 17.5
  Top Layer w0.152: ESP-1.3@15.6,67.5 17.671,69.571 24.539,69.571 26.647,71.679 29.114,71.679 29.622,72.187 29.622,72.976 30.077,73.431 R33.2@30.175,73.431
NetESP-1_16: ESP-1.10 R36.2 | length 10.3
  Top Layer w0.152: ESP-1.10@23.6,83.5 23.6,82.216 v1(23.8,82.017) ; v1(29.369,76.676) R36.2@30.175,76.676
  Bottom Layer w0.152: v1(23.8,82.017) 23.8,81.693 28.817,76.676 v1(29.369,76.676)
NetJ1_3: J1.3 R41.1 | length 15.2
  Top Layer w0.152: J1.3@4.572,60.655 9.169,65.253 15.519,65.253 16.154,64.618 16.154,64.043 16.684,63.514 R41.1@16.84,63.514
NetLED1_1: LED1.A R37.1 | length 3.6
  Top Layer w0.152: LED1.A@21.971,58.242 22.657,58.928 25.171,58.928 R37.1@25.248,59.004
NetLS1_1: LS1.1 R38.1 | length 19
  Top Layer w0.152: LS1.1@10.77,55.423 9.5,56.693 9.5,64.186 9.957,64.643 14.529,64.643 16.187,62.985 17.632,62.985 R38.1@18.161,63.514
NetR20_1: R20.1 RTL1.72 | length 3.1
  Top Layer w0.152: RTL1.72@68.77,60.705 68.77,61.938 69.698,62.865 R20.1@69.698,63.431
NetR21_1: R21.1 RTL1.71 | length 3.4
  Top Layer w0.152: RTL1.71@69.27,60.705 69.27,61.86 R21.1@70.841,63.431
NetR26_1: R26.1 RTL1.17 | length 4.8
  Top Layer w0.152: R26.1@61.214,39.846 61.214,42.774 61.77,43.33 RTL1.17@61.77,44.425
NetR27_1: R27.1 U1.3 | length 6.8
  Top Layer w0.152: R27.1@69.672,67.989 70.173,67.989 73.558,71.374 U1.3@73.558,72.894
NetR28_1: R28.1 U1.7 | length 8
  Top Layer w0.152: R28.1@69.672,70.961 69.704,70.993 71.247,70.993 v1(71.374,70.866) ; v1(73.203,68.707) 74.828,67.081 U1.7@74.828,66.094
  Bottom Layer w0.152: v1(71.374,70.866) 71.374,70.536 v1(73.203,68.707)
NetR32_1: R32.1 S1.1 | length 6.4
  Top Layer w0.152: S1.1@29.424,79.148 30.746,77.826 31.7,77.826 31.979,78.105 32.732,78.105 33.215,77.622 33.648,77.622 R32.1@34.595,76.676
NetR39_1: R39.1 R40.1 S2.1 | length 36.7
  Top Layer w0.152: R39.1@26.645,58.154 26.743,58.154 27.28,58.691 27.28,61.492 25.74,63.031 25.74,63.628 25.131,64.238 25.131,65.276 24.976,65.43 23.063,65.43 22.758,65.735 22.758,68.859 23.114,69.215 24.614,69.215 26.748,71.349 30.632,71.349 30.886,71.603 30.886,73.681 30.607,73.96 30.256,73.96 29.921,74.295 29.921,74.785 28.702,76.004 28.702,76.886 29.025,77.209 31.115,77.209 R40.1@31.648,76.676 31.743,76.676 v1(32.334,77.267) ; S2.1@33.149,79.148 33.122,79.121 33.579,78.663 v1(33.579,78.156)
  Bottom Layer w0.152: v1(32.334,77.267) 33.223,78.156 v1(33.579,78.156)
NetR42_1: R42.1 VT1.1 | length 4.4
  Top Layer w0.152: VT1.1@22.51,62.906 23.023,62.906 23.423,62.505 23.423,62.486 23.557,62.352 23.576,62.352 23.952,61.976 23.952,61.577 24.265,61.265 24.501,61.265 24.694,61.072 24.694,60.591 25.149,60.135 R42.1@25.248,60.135
NetR43_1: R43.1 VT2.1 | length 4.8
  Top Layer w0.152: VT2.1@24.277,64.831 24.277,64.66 25.435,63.502 25.435,62.905 26.645,61.696 R43.1@26.645,60.979
NetR44_1: R44.1 U3.48 | length 1.6
  Top Layer w0.305: R44.1@31.166,19.831 31.166,21.409 U3.48@31.178,21.421
NetR45_1: R45.1 U4.48 | length 1.6
  Top Layer w0.305: R45.1@89.332,19.831 89.342,19.841 U4.48@89.342,21.421
NetR46_1: R46.1 U3.45 | length 1.6
  Top Layer w0.305: U3.45@28.13,21.421 28.143,21.408 R46.1@28.143,19.831
NetR47_1: R47.1 U4.45 | length 1.6
  Top Layer w0.305: R47.1@86.284,19.831 86.284,21.411 U4.45@86.294,21.421
NetR48_1: R48.1 U3.42 | length 1.6
  Top Layer w0.508: U3.42@25.082,21.421 25.095,21.408 R48.1@25.095,19.831
NetR49_1: R49.1 U4.42 | length 1.6
  Top Layer w0.305: U4.42@83.246,21.421 83.246,19.82 R49.1@83.261,19.805
NetR50_1: R50.1 U3.39 | length 1.6
  Top Layer w0.305: R50.1@22.022,19.831 22.022,21.409 U3.39@22.034,21.421
NetR51_1: R51.1 U4.39 | length 1.6
  Top Layer w0.305: R51.1@80.188,19.831 80.198,19.841 U4.39@80.198,21.421
NetR52_1: R52.1 U3.36 | length 1.6
  Top Layer w0.305: R52.1@18.974,19.831 18.974,21.409 U3.36@18.986,21.421
NetR53_1: R53.1 U4.36 | length 2
  Top Layer w0.305: R53.1@76.696,19.634 76.759,19.697 76.759,20.32 77.15,20.711 U4.36@77.15,21.421
NetR54_1: R54.1 U3.33 | length 1.6
  Top Layer w0.305: R54.1@15.926,19.831 15.926,21.409 U3.33@15.938,21.421
NetR55_1: R55.1 U4.33 | length 1.6
  Top Layer w0.305: R55.1@74.092,19.831 74.102,19.841 U4.33@74.102,21.421
NetR56_1: R56.1 U3.30 | length 1.6
  Top Layer w0.305: R56.1@12.878,19.831 12.878,21.409 U3.30@12.89,21.421
NetR57_1: R57.1 U4.30 | length 1.6
  Top Layer w0.305: R57.1@71.044,19.831 71.044,21.411 U4.30@71.054,21.421
NetR58_1: R58.1 U3.27 | length 1.6
  Top Layer w0.305: U3.27@9.842,21.421 9.855,21.408 R58.1@9.855,19.831
NetR59_1: R59.1 U4.27 | length 1.6
  Top Layer w0.305: R59.1@67.97,19.831 67.97,21.385 U4.27@68.006,21.421
NetR60_1: R60.1 U5.48 | length 1.6
  Top Layer w0.305: U5.48@60.094,21.421 60.096,21.419 R60.1@60.096,19.831
NetR61_1: R61.1 U6.48 | length 1.6
  Top Layer w0.305: R61.1@118.237,19.831 118.245,19.839 U6.48@118.245,21.421
NetR62_1: R62.1 U5.45 | length 1.6
  Top Layer w0.305: U5.45@57.046,21.421 57.048,21.419 R62.1@57.048,19.831
NetR63_1: R63.1 U6.45 | length 1.6
  Top Layer w0.305: U6.45@115.197,21.421 115.197,19.848 R63.1@115.214,19.831
NetR64_1: R64.1 U5.42 | length 1.6
  Top Layer w0.305: U5.42@53.998,21.421 54,21.419 R64.1@54,19.831
NetR65_1: R65.1 U6.42 | length 1.6
  Top Layer w0.305: R65.1@112.141,19.837 112.149,19.845 U6.42@112.149,21.421
NetR66_1: R66.1 U5.39 | length 1.9
  Top Layer w0.305: U5.39@50.95,21.421 50.95,20.373 R66.1@51.587,19.736
NetR67_1: R67.1 U6.39 | length 1.6
  Top Layer w0.305: R67.1@109.093,19.824 109.101,19.832 U6.39@109.101,21.421
NetR68_1: R68.1 U5.36 | length 1.9
  Top Layer w0.305: U5.36@47.902,21.421 47.902,20.754 48.293,20.363 48.293,19.804 R68.1@48.412,19.685
NetR69_1: R69.1 U6.36 | length 1.6
  Top Layer w0.305: U6.36@106.053,21.421 106.053,19.848 R69.1@106.07,19.831
NetR70_1: R70.1 U5.33 | length 1.6
  Top Layer w0.305: U5.33@44.854,21.421 44.854,19.833 R70.1@44.856,19.831
NetR71_1: R71.1 U6.33 | length 1.6
  Top Layer w0.305: R71.1@102.997,19.831 103.005,19.839 U6.33@103.005,21.421
NetR72_1: R72.1 U5.30 | length 1.6
  Top Layer w0.305: U5.30@41.806,21.421 41.808,21.419 R72.1@41.808,19.831
NetR73_1: R73.1 U6.30 | length 1.6
  Top Layer w0.305: R73.1@99.949,19.831 99.957,19.839 U6.30@99.957,21.421
NetR74_1: R74.1 U5.27 | length 1.6
  Top Layer w0.305: U5.27@38.758,21.421 38.76,21.419 R74.1@38.76,19.831
NetR75_1: R75.1 U6.27 | length 1.6
  Top Layer w0.305: R75.1@96.901,19.831 96.901,21.413 U6.27@96.909,21.421
NRESET_RTL: C3.1 D10.1 ESP-1.7 R2.2@36.855,79.14 R15.2 RTL1.99 | length 66.4
  Top Layer w0.152: ESP-1.7@23.6,67.5 23.6,66.291 v1(23.901,65.989) ; R2.2@36.855,79.14 36.9,79.096 v1(38.71,79.096) ; v1(45.11,67.462) 46.126,66.446 D10.1@46.601,66.446 ; v1(45.822,74.498) 46.601,73.719 D10.1@46.601,66.446 ; R15.2@51.714,63.431 C3.1@52.785,63.431 ; RTL1.99@55.27,60.705 55.27,61.621 53.46,63.431 C3.1@52.883,63.431 C3.1@52.785,63.431 ; D10.1@46.601,66.446 46.677,66.37 47.777,66.37 48.59,65.557 51.386,65.557 52.268,64.675 52.268,63.947 C3.1@52.785,63.431
  Bottom Layer w0.152: v1(23.901,65.989) 24.587,65.303 26.077,65.303 26.568,64.812 26.568,61.747 26.975,61.341 43.053,61.341 43.713,62.001 43.713,66.599 44.602,67.488 44.856,67.488 45.11,67.234 v1(45.11,67.462) ; v1(38.71,79.096) 41.224,79.096 v1(45.822,74.498)